# Altium PCB Bluetooth.PcbDoc
Units mm, origin at the board's own origin, x right, y up, seen from the top; angles counter-clockwise.
Board outline 25 x 40 mm, 2 copper layers (Top Layer, Bottom Layer); 11 components, 13 nets, 70 pads, 6 vias.
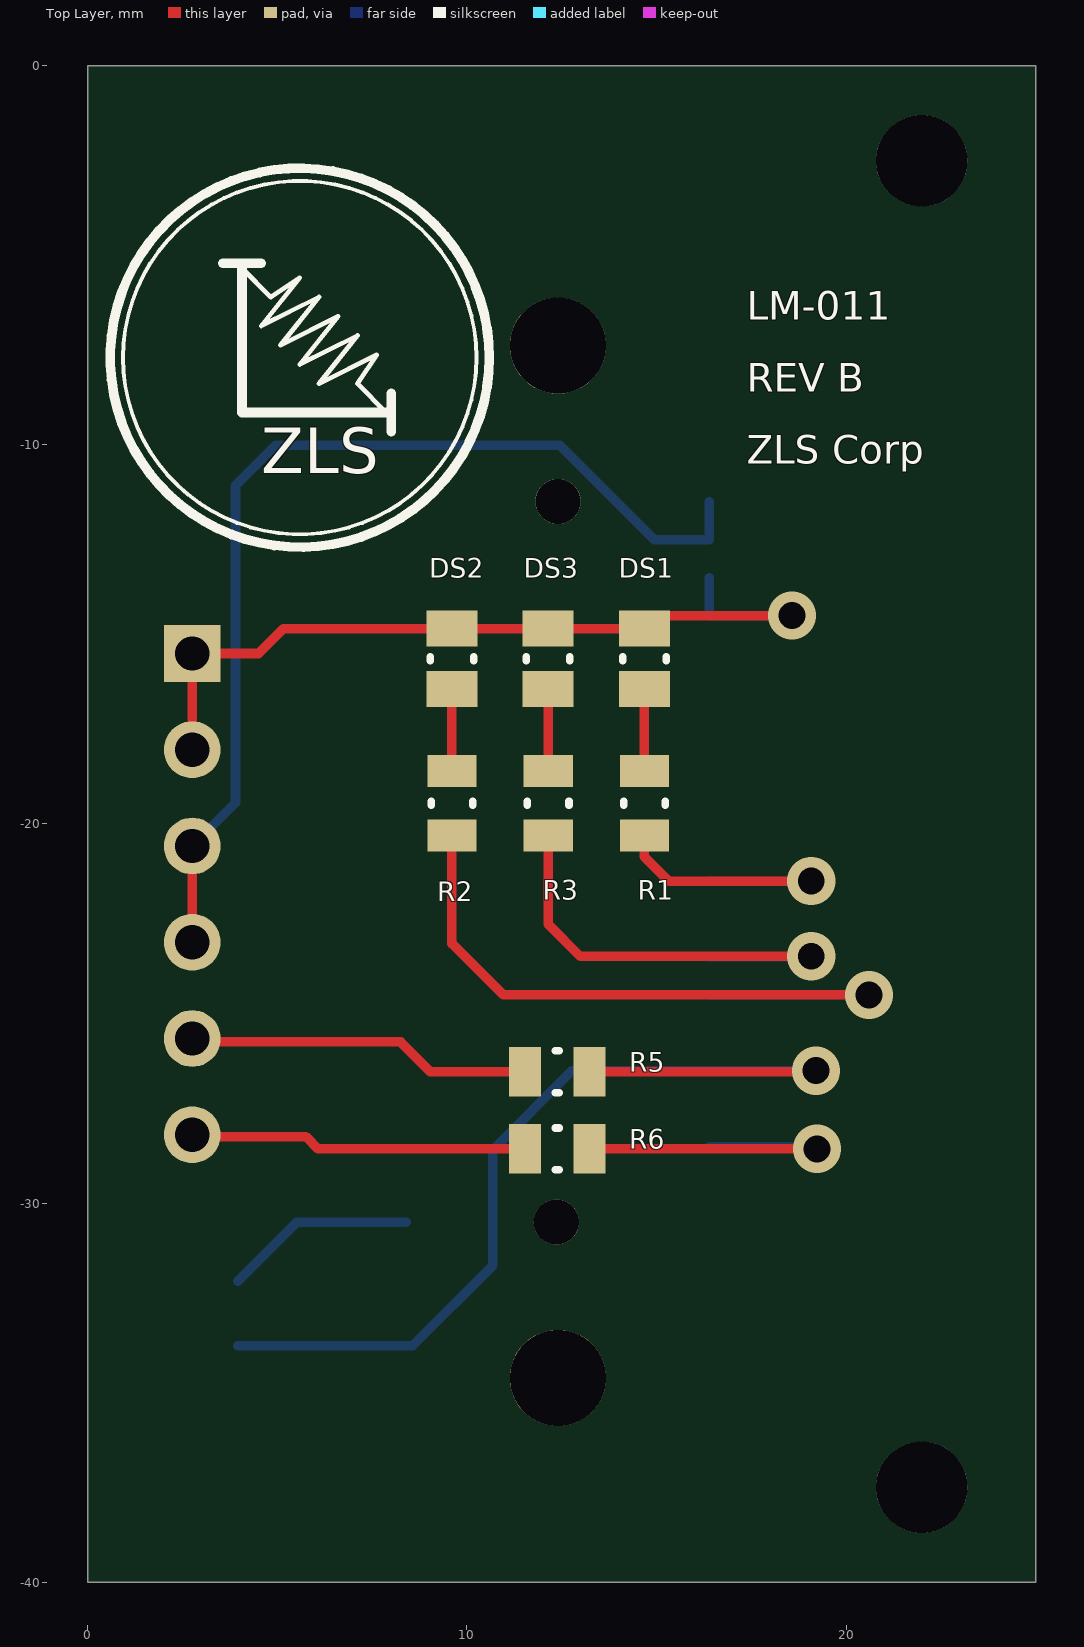
[diagram p0: Top Layer view]
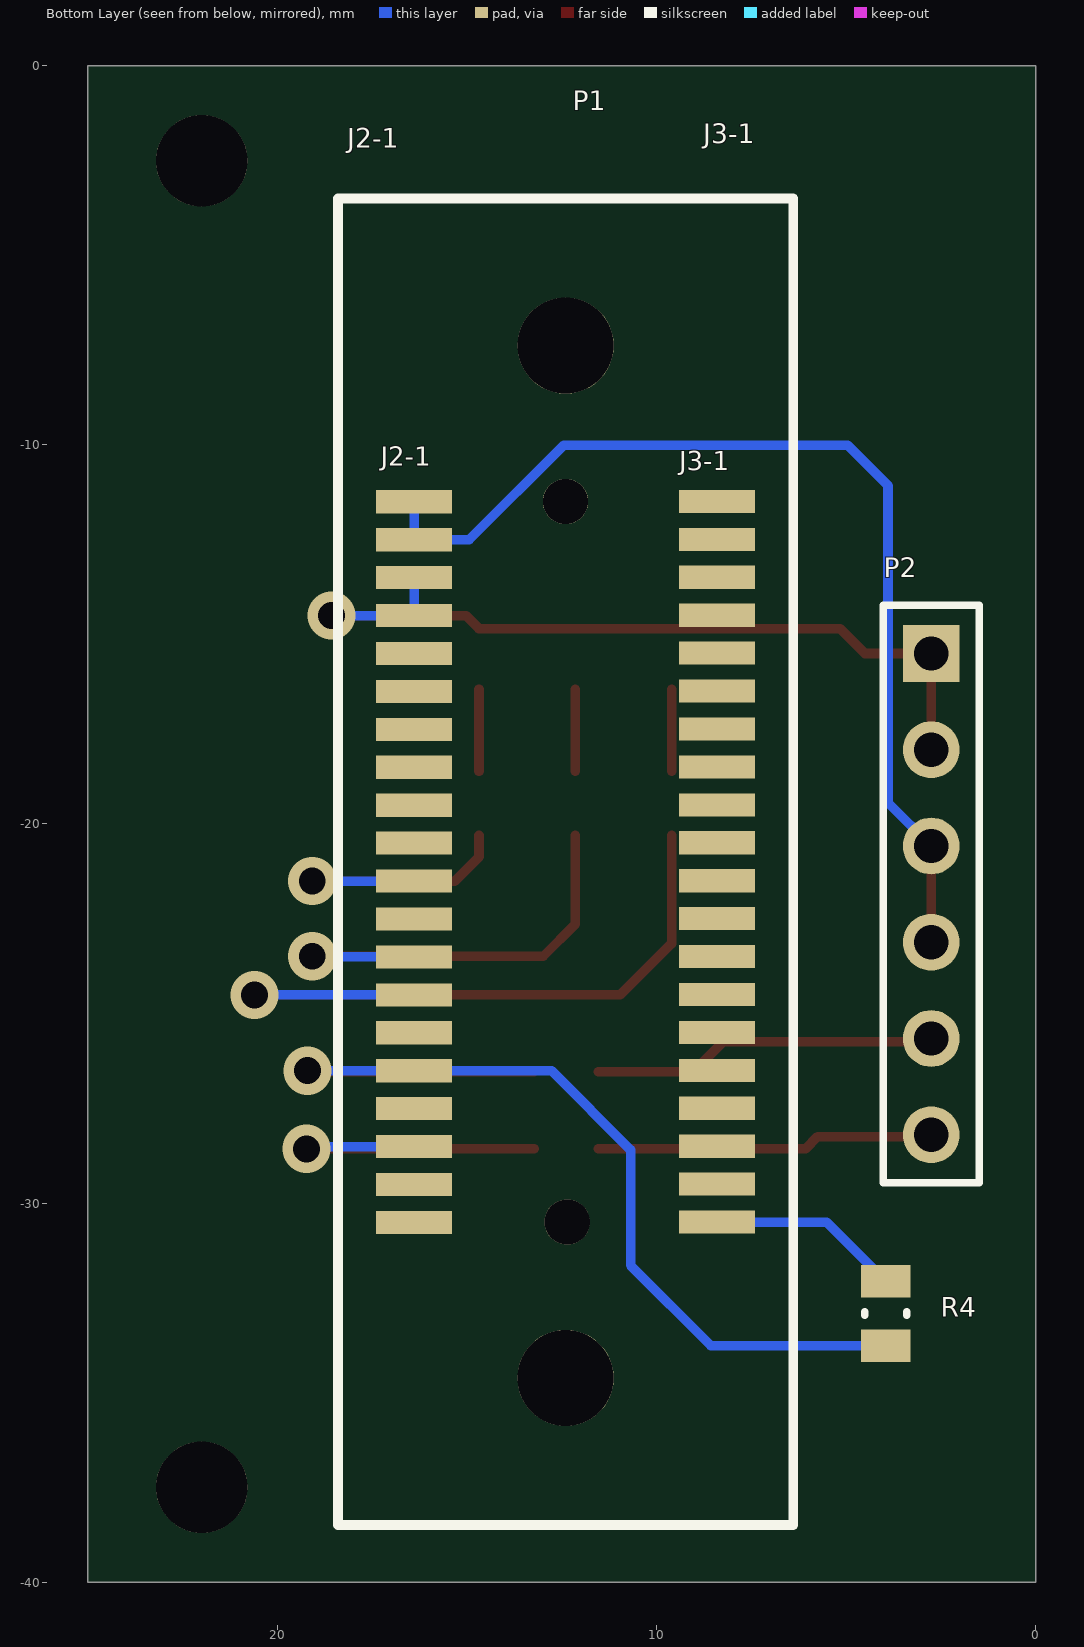
[diagram p1: Bottom Layer view, seen from below]

## Layer stack, top to bottom
Top Solder: solder mask 0.0102, Solder Resist, Dk 3.5
Top Layer: signal copper 0.0356
Dielectric 1: dielectric 0.32, FR-4, Dk 4.8
Bottom Layer: signal copper 0.0356
Bottom Solder: solder mask 0.0102, Solder Resist, Dk 3.5

## Board outline
0,-40 25,-40 25,0 0,0

## Design rules (kind name [scope] priority, off if disabled: settings)
Clearance [All] p1: gap=0.254 ignorepadtopadclearanceinfootprint=FALSE except(0: Arc-Hole Track-Hole SMDPad-Hole THPad-Hole Via-Hole Fill-Hole Poly-Hole Region-Hole Text-Hole)
MinimumSolderMaskSliver [All] p1: minsoldermaskwidth=0.18
PolygonConnect [All] p1: connectstyle=Relief reliefconductorwidth=0.254 reliefentries=4 polygonreliefangle="90 Angle" airgapwidth=0.254
RoutingVias [All] p1: holewidth=0.711 width=1.27 viastyle="Through Hole" minholewidth=0.711 minwidth=1.27 maxholewidth=0.711 maxwidth=1.27
SilkToSolderMaskClearance [IsPad] p1: minsilkscreentomaskgap=0.1 clearancetoexposedcopper=TRUE
SolderMaskExpansion [All] p1: expansion=0.102
Width [All] p1: maxlimit=0.254 minlimit=0.254 preferedwidth=0.254
28 further rules are at their usual default settings.

## Components (designator, comment, footprint, x,y, rotation, side; value= is the part's Value field where it differs from the comment)
DS1 "Lite-On LTST-S220KGKT Green LED, 571 nm 2012 (0805) Side View, Rectangle Lens SMD package" 0805C_L 14.682,-15.644 r270 top
DS2 "Lite-On LTST-S220KGKT Green LED, 571 nm 2012 (0805) Side View, Rectangle Lens SMD package" 0805C_L 9.602,-15.644 r270 top
DS3 "Lite-On LTST-S220KGKT Green LED, 571 nm 2012 (0805) Side View, Rectangle Lens SMD package" 0805C_L 12.142,-15.644 r270 top
P1 "FSI-120-03-G-D-E-AB" FSI-120-03-G-D-E-AB 8.395,-30.503 r90 bottom
P2 "Header 6" HDR1X6 2.75,-15.5 r270 bottom
R1 "3.9k" RESC0805(2012)_L 14.682,-19.454 r90 top
R2 "3.9k" RESC0805(2012)_L 9.602,-19.454 r90 top
R3 "3.9k" RESC0805(2012)_L 12.142,-19.454 r90 top
R4 "100" RESC0805(2012)_L 3.95,-32.916 r270 bottom value=3.9k
R5 "100" RESC0805(2012)_L 12.38,-26.538 r0 top value=3.9k
R6 "100" RESC0805(2012)_L 12.38,-28.57 r0 top value=3.9k

## Footprints (in the part's own frame and the unit in brackets; to place one, negate y for a bottom-side part, rotate by r counter-clockwise, add the part's x,y. Pads: shape width x height; smd on the part's side, far side on the other; paste and mask are expansions set on the pad)
0805C_L [mm]
  rect 0.95x1.35 smd: 1(-0.8,0) 2(0.8,0)
  silkscreen extent -0.05,-0.57 0.05,0.58, body extent -1.1,-0.72 1.1,0.72, height 0.75
FSI-120-03-G-D-E-AB [mil]
  round 100 hole 100: hole(-161.9,157.6) hole(910.5,157.6)
  round 47 hole 47: hole(0,156) hole(748.6,157.6)
  rect 24x78.74 smd: J2-1(748.21,314.96) J2-2(708.81,314.96) J2-3(669.41,314.96) J2-4(630.01,314.96) J2-5(590.61,314.96) J2-6(551.21,314.96) J2-7(511.81,314.96) J2-8(472.41,314.96) J2-9(433.01,314.96) J2-10(393.61,314.96) J2-11(354.21,314.96) J2-12(314.81,314.96) J2-13(275.41,314.96) J2-14(236.01,314.96) J2-15(196.61,314.96) J2-16(157.21,314.96) J2-17(117.81,314.96) J2-18(78.41,314.96) J2-19(39.01,314.96) J2-20(-0.39,314.96) J3-1(748.6,0.24) J3-2(709.2,0.24) J3-3(669.8,0.24) J3-4(630.4,0.24) J3-5(591,0.24) J3-6(551.6,0.24) J3-7(512.2,0.24) J3-8(472.8,0.24) J3-9(433.4,0.24) J3-10(394,0.24) J3-11(354.6,0.24) J3-12(315.2,0.24) J3-13(275.8,0.24) J3-14(236.4,0.24) J3-15(197,0.24) J3-16(157.6,0.24) J3-17(118.2,0.24) J3-18(78.8,0.24) J3-19(39.4,0.24) J3-20(0,0.24)
  silkscreen extent -315,-79 1063,394, body extent -259,-22 1084,346, height 162
HDR1X6 [mm] "Connector; Header; 6 Position"
  rect 1.5x1.5 hole 0.9: 1(0,0)
  round 1.5 hole 0.9: 2(2.54,0) 3(5.08,0) 4(7.62,0) 5(10.16,0) 6(12.7,0)
  silkscreen extent -1.27,-1.27 13.97,1.27
RESC0805(2012)_L [mm] "Chip Resistor, Body 2.0x1.3mm, IPC High Density"
  rect 0.85x1.3 smd: 1(-0.85,0) 2(0.85,0)
  silkscreen extent -0.05,-0.55 0.05,0.55, body extent -1.1,-0.67 1.1,0.68, height 0.7

## Part data
DS1 DS2 DS3: library part "LED A/K", Case/Package=0805, Case Code (Metric)=2012, Colour=Green, Forward Current=20mA, Forward Voltage=2V, Lens Colour=Colorless, Manufacturer="Vishay / Lite-On", Manufacturer Part Number=LTST-S220KGKT, Max Operating Temperature=85°C, Min Operating Temperature=-55°C, Package Quantity=4000, Power Dissipation=75W, Power Rating=75mW, Supplier Part Number 1=160-1468-1-ND, Case Code (Imperial)=0805, ComponentLink1Description=https://datasheet.ciiva.com/11775/0900766b80dc0b70-11775441.pdf, ComponentLink1URL=https://datasheet.ciiva.com/11775/0900766b80dc0b70-11775441.pdf, ComponentLink2Description=https://datasheet.ciiva.com/2110/s-110-ltst-s220kgkt-2110069.pdf, ComponentLink2URL=https://datasheet.ciiva.com/2110/s-110-ltst-s220kgkt-2110069.pdf, ComponentLink3Description=https://datasheet.ciiva.com/2110/s-110-ltst-s220kgkt-2110070.pdf, ComponentLink3URL=https://datasheet.ciiva.com/2110/s-110-ltst-s220kgkt-2110070.pdf, ComponentLink4Description=https://datasheet.ciiva.com/12400/100-ltst-s220kgkt-59602-12400886.pdf, ComponentLink4URL=https://datasheet.ciiva.com/12400/100-ltst-s220kgkt-59602-12400886.pdf, ComponentLink5Description=https://datasheet.ciiva.com/2110/s-110-ltst-s220kgkt-2110071.pdf, ComponentLink5URL=https://datasheet.ciiva.com/2110/s-110-ltst-s220kgkt-2110071.pdf, ComponentLink6Description=https://datasheet.ciiva.com/16379/ltst-s220kgkt-16379082.pdf, ComponentLink6URL=https://datasheet.ciiva.com/16379/ltst-s220kgkt-16379082.pdf, ComponentLink7Description=http://www.farnell.com/cad/2124774.pdf, ComponentLink7URL=http://www.farnell.com/cad/2124774.pdf, ComponentLink8Description=http://www.farnell.com/datasheets/693084.pdf, ComponentLink8URL=http://www.farnell.com/datasheets/693084.pdf, Depth=0.6mm, Dominant Wavelength=568nm, Height=0.6mm, Illumination Colour=Green, Lead Free="Lead Free", Length=2.1mm, Lens Style=Diffused,Colorless, Lens Transparency=Clear, Luminous Intensity=35mcd, Mount="Surface Mount", Number of Elements=1, Number of LEDs=1, Number of Pins=2, Packaging="Tape and Reel", Pricing 1="1=0.29, 10=0.212, 25=0.1564, 100=0.1117, 250=0.0759, 500=0.067, 1000=0.0525 (USD)", Pricing 2="1=0.325, 10=0.317, 100=0.23, 200=0.228, 400=0.182, 900=0.147, 3000=0.114, 9000=0.107 (GBP)", Radiation Hardening=No, RoHS=YES, Stock 1=74800, Stock 2=2271, Supplier 1=Digi-Key, Supplier 2=Farnell, Supplier Part Number 2=2062310, Test Current=20mA, Viewing Angle=130°, Wavelength=574nm, Width=1mm
P2: "Header, 6-Pin", LatestRevisionDate=17-Jul-2002, LatestRevisionNote="Re-released for DXP Platform.", Publisher="Altium Limited"
R1 R2 R3 R4 R5 R6: library part CMP-1013-00215-1, "2R55 0.125W 1% 0805 (2012 Metric)  SMD", Case-EIA=0805, Case-Metric=2012, Power="0.125 W", Tolerance="1 %", Technology=SMT
P1: Supplier 1=Avnet, Supplier Part Number 1=FSI-120-03-G-D-E-AB

## Free pads (board coordinates)
  round 2.413 hole 2.413 unplated: ""(22,-37.5) ""(22,-2.5)

## Via types
v1: diameter 1.27, hole 0.711, Top Layer to Bottom Layer, 6 vias

## Nets (pads, with @x,y where several pads share a name; then routed paths per layer and width w, separated by ;. In a path a pad name is that pad's centre, name@x,y a point inside that pad or via, vN(x,y) a via of type N, cw(c..) or ccw(c..) an arc to the next point about the centre after c; other vN are vias at no path point)
+3.3: DS1.1 DS2.1 DS3.1 P1.J2-3 P1.J2-4 P2.1 P2.2 | length 22
  Top Layer w0.254: P2.2 P2.1 4.5,-15.5 5.156,-14.844 DS2.1 DS3.1 DS1.1 15.025,-14.501 v1(18.575,-14.501)
  Bottom Layer w0.254: P1.J2-3 P1.J2-4 v1(18.575,-14.501)
"Blue LED": P1.J2-14 R2.1 | length 18.6
  Top Layer w0.254: R2.1 9.602,-23.152 10.958,-24.508 v1(20.607,-24.508)
  Bottom Layer w0.254: P1.J2-14 v1(20.607,-24.508)
GND: P1.J2-1 P1.J2-2 P2.3 P2.4 | length 27.5
  Top Layer w0.254: P2.4 P2.3
  Bottom Layer w0.254: P2.3 3.891,-19.439 3.891,-11.072 4.958,-10.005 12.446,-10.005 14.94,-12.499 P1.J2-2@16.388,-12.499 ; P1.J2-2 P1.J2-2@16.388,-12.499 ; P1.J2-1 16.388,-11.498 P1.J2-2@16.388,-12.499
"Green LED": P1.J2-13 R3.1 | length 12.3
  Top Layer w0.254: R3.1 12.142,-22.644 12.987,-23.49 v1(19.083,-23.49)
  Bottom Layer w0.254: P1.J2-13 19.083,-23.508 v1(19.083,-23.49)
NetDS1_2: DS1.2 R1.2 | length 2.2
  Top Layer w0.254: R1.2 DS1.2
NetDS2_2: DS2.2 R2.2 | length 2.2
  Top Layer w0.254: R2.2 DS2.2
NetDS3_2: DS3.2 R3.2 | length 2.2
  Top Layer w0.254: R3.2 DS3.2
"Red LED": P1.J2-11 R1.1 | length 7.9
  Top Layer w0.254: R1.1 14.682,-20.866 15.322,-21.506 v1(19.083,-21.506)
  Bottom Layer w0.254: P1.J2-11 v1(19.083,-21.506)
RS232_RX: P2.6 R6.1 | length 8.8
  Top Layer w0.254: P2.6@3,-28 3.25,-28.25 5.75,-28.25 6.07,-28.57 R6.1
RS232_TX: P2.5 R5.1 | length 8.9
  Top Layer w0.254: P2.5@3,-25.75 8.25,-25.75 9.038,-26.538 R5.1
RXD: P1.J2-18 R6.2 | length 8.9
  Top Layer w0.254: R6.2 v1(19.238,-28.57)
  Bottom Layer w0.254: P1.J2-18 19.179,-28.511 v1(19.238,-28.57)
TXD: P1.J2-16 R4.2 R5.2 | length 26.1
  Top Layer w0.254: R5.2 19.238,-26.538 v1(19.21,-26.51)
  Bottom Layer w0.254: R4.2 8.561,-33.766 10.681,-31.646 10.681,-28.598 12.77,-26.51 P1.J2-16 v1(19.21,-26.51)
VCC_2V85: P1.J3-20 R4.1 | length 5.1
  Bottom Layer w0.254: R4.1 5.513,-30.503 P1.J3-20
pads on no net: P1.hole P1.J2-5 P1.J2-6 P1.J2-7 P1.J2-8 P1.J2-9 P1.J2-10 P1.J2-12 P1.J2-15 P1.J2-17 P1.J2-19 P1.J2-20 P1.J3-1 P1.J3-2 P1.J3-3 P1.J3-4 P1.J3-5 P1.J3-6 P1.J3-7 P1.J3-8 P1.J3-9 P1.J3-10 P1.J3-11 P1.J3-12 P1.J3-13 P1.J3-14 P1.J3-15 P1.J3-16 P1.J3-17 P1.J3-18 P1.J3-19

## Silkscreen, mask and mechanical layers (free items; w line width, h text height)
Top Overlay:
  circle w0.1: c5.588,-7.696 r4.663
  circle w0.254: c5.588,-7.696 r5
  lines w0.127: 4.064,-5.334 4.826,-6.096 5.588,-5.588 4.572,-6.858 6.096,-6.096 5.08,-7.366 6.604,-6.604 5.588,-7.874 7.112,-7.112 6.096,-8.382 7.62,-7.62 7.112,-8.382 7.874,-9.144
  lines w0.254: 3.556,-5.207 4.572,-5.207 ; 4.064,-5.334 4.064,-9.144 7.874,-9.144 ; 8.001,-9.652 8.001,-8.636
  text "LM-011" at 17.376,-6.69 h0.75
  text "REV B" at 17.376,-8.595 h0.75
  text "ZLS Corp" at 17.376,-10.5 h0.75
  text "ZLS" at 4.572,-10.744 h1.2
Bottom Overlay:
  text "J2-1" at 17.272,-10.541 h0.5
  text "J3-1" at 9.398,-10.668 h0.5

## Dimensions
0,-40.005 to 0,0 on Mechanical 13
0,-40.005 to 24.994,-40.005 on Mechanical 13

## Text inside footprints (layer, text, board x,y; h text height)
P1: Bottom Overlay "J3-1" at 8.763,-2.032 h0.51; Bottom Overlay "J2-1" at 18.161,-2.159 h0.51